# Altium PCB Q24_BRAKE_LIGHT.PcbDoc
Units mil, origin at the board's own origin, x right, y up, seen from the top; angles counter-clockwise.
Board outline 5151.65 x 2362.2 mil, 2 copper layers (Top Layer, Bottom Layer); 73 components, 8 nets, 146 pads, 31 vias.
Unrouted connection lines stored in the file: 6.
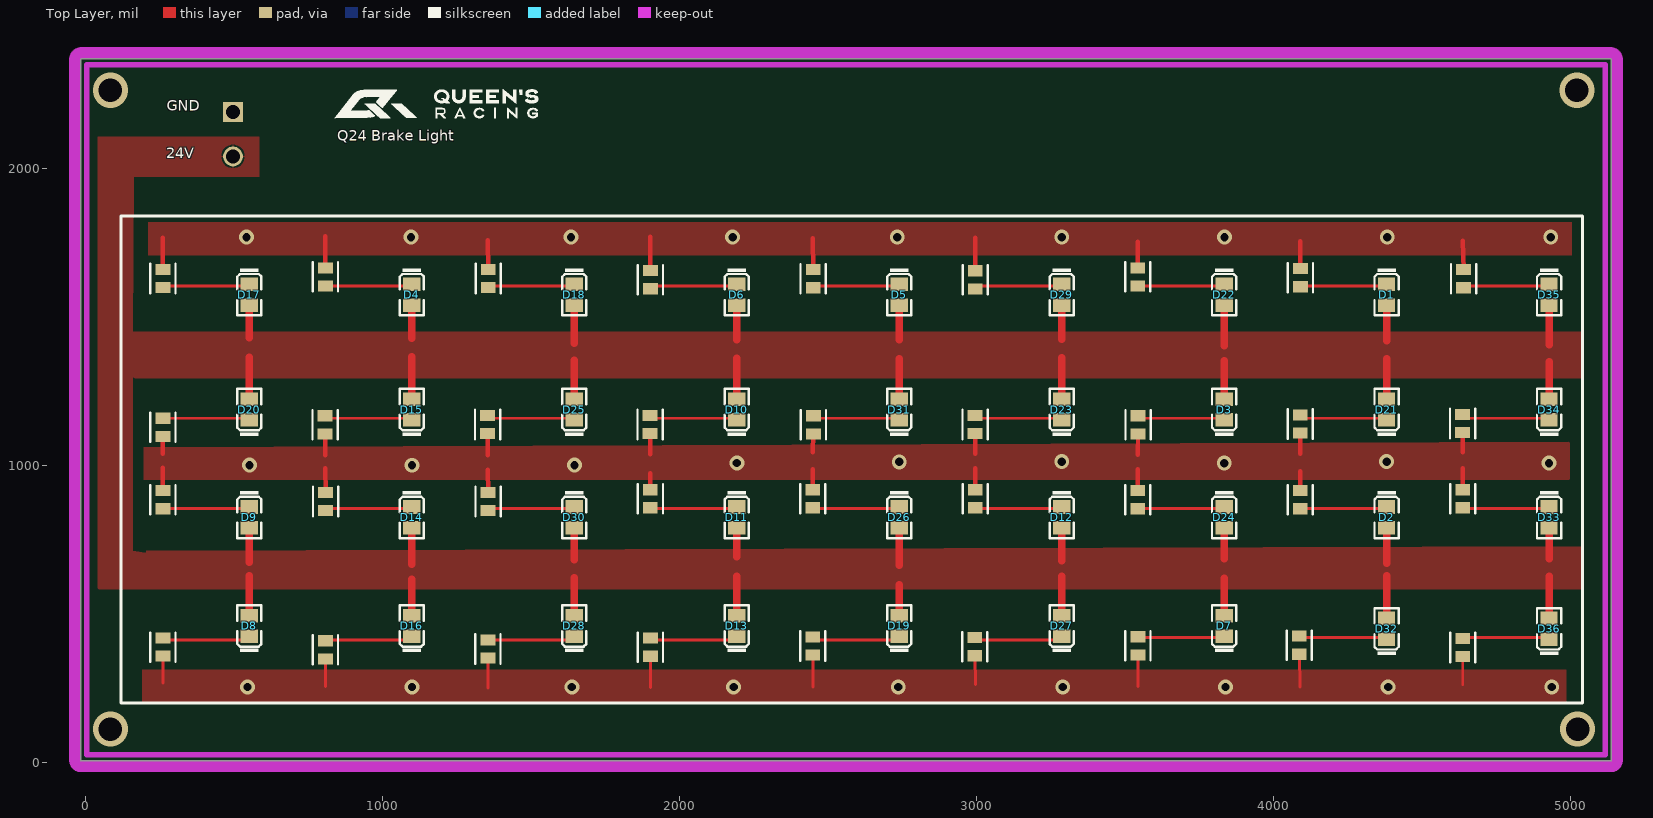
[diagram p0: Top Layer view]
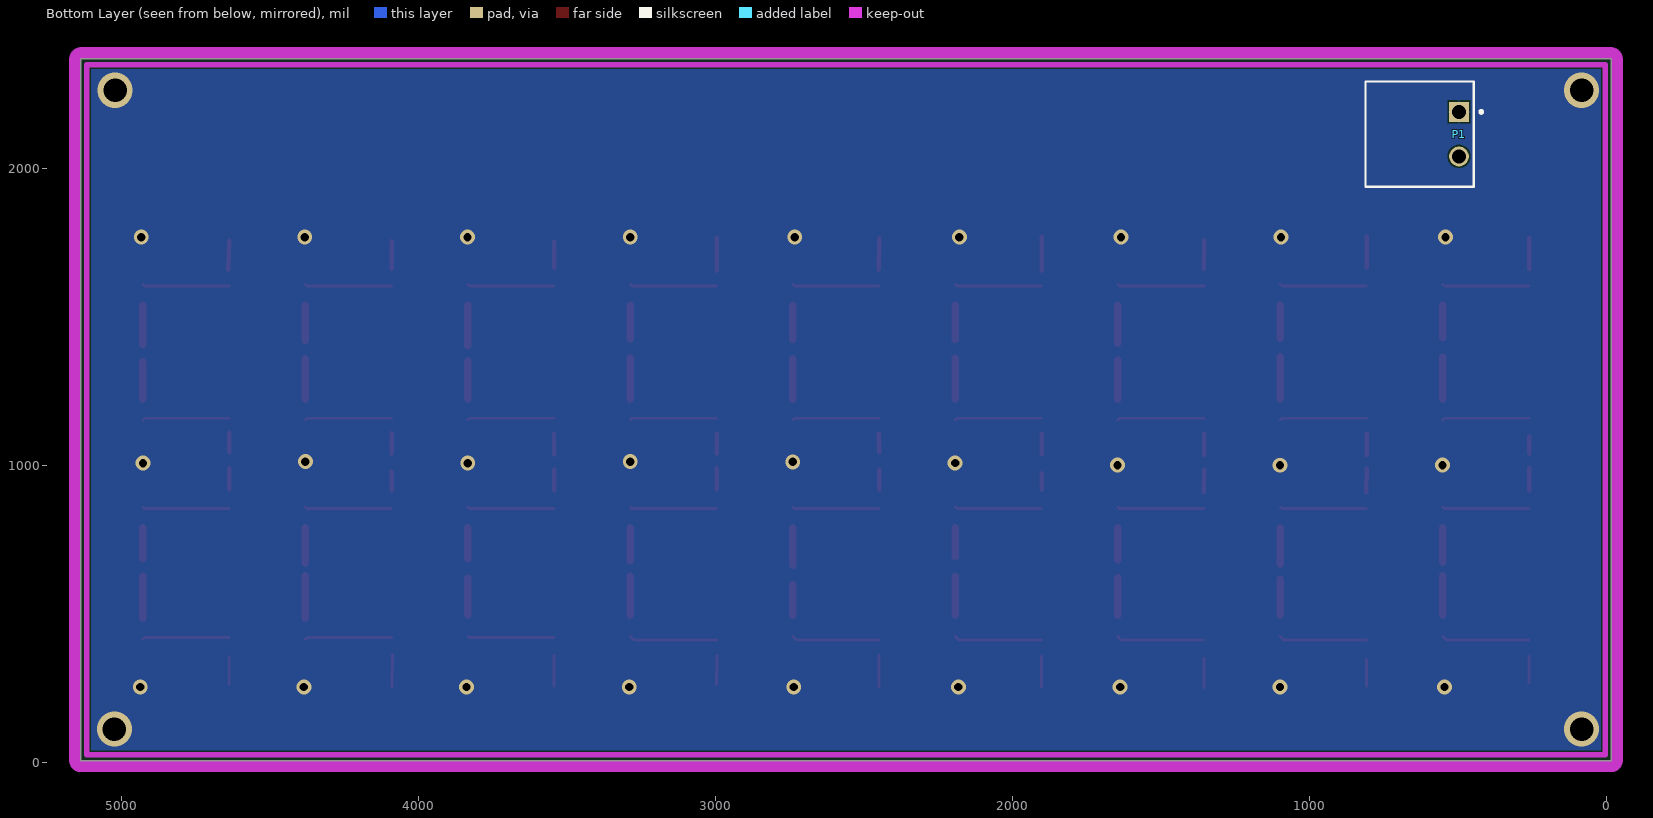
[diagram p1: Bottom Layer view, seen from below]

## Layer stack, top to bottom
Top Solder: solder mask 0.4, Solder Resist, Dk 3.5
Top Layer: signal copper 1.4
Dielectric 1: dielectric 12.6, FR-4, Dk 4.8
Bottom Layer: signal copper 1.4
Bottom Solder: solder mask 0.4, Solder Resist, Dk 3.5

## Board outline
-16.63,5.22 -16.63,2367.43 5135.03,2367.43 5135.03,5.22

## Design rules (kind name [scope] priority, off if disabled: settings)
BoardOutlineClearance [All] p1: gap=7.87 ignorepadtopadclearanceinfootprint=FALSE
Clearance [All] p1: gap=5 ignorepadtopadclearanceinfootprint=FALSE except(9.84: Arc-Hole Track-Hole SMDPad-Hole THPad-Hole Via-Hole Fill-Hole Poly-Hole Region-Hole Text-Hole)
ComponentClearance [All] p1: gap=5 collisioncheckmode=3 verticalgap=5 showdistances=TRUE
DiffPairsRouting [All] p1: maxlimit=10 minlimit=5 mostfreqgap=5 toplayer_minwidth=5 toplayer_maxwidth=1000 toplayer_prefwidth=5 bottomlayer_minwidth=5 bottomlayer_maxwidth=1000 bottomlayer_prefwidth=5 maxuncoupledlength=500
Height [All] p1: minheight=0 maxheight=71497.94 prefheight=500
HoleSize [All] p1: absolutevalues=TRUE maxlimit=248.03 minlimit=11.81 maxpercent=80.000 minpercent=20.000
HoleToHoleClearance [All] p1: gap=9.84 allowstackedmicrovias=FALSE
MinimumAnnularRing [All] p1: minimumring=3
MinimumSolderMaskSliver [All] p1: minsoldermaskwidth=0
PlaneClearance [All] p1: clearance=5
PlaneConnect PlaneConnectPowerPads [InPadClass('PowerPads')] p1: planeconnectstyle=Direct reliefexpansion=20 reliefentries=4 reliefconductorwidth=10 reliefairgap=10
PlaneConnect [All] p2: pad.planeconnectstyle=Relief pad.reliefexpansion=11.81 pad.reliefentries=4 pad.reliefconductorwidth=5 pad.reliefairgap=5 via.planeconnectstyle=Direct via.reliefexpansion=11.81 via.reliefentries=4 via.reliefconductorwidth=5 via.reliefairgap=5
PolygonConnect PolygonConnectPowerPads [All vs (InPadClass('PowerPads'))] p1: connectstyle=Direct reliefconductorwidth=10 reliefentries=4 polygonreliefangle="90 Angle" airgapwidth=10
PolygonConnect [All] p2: thpad.connectstyle=Relief thpad.reliefconductorwidth=5 thpad.reliefentries=4 thpad.polygonreliefangle="90 Angle" thpad.airgapwidth=5 smdpad.connectstyle=Relief smdpad.reliefconductorwidth=5 smdpad.reliefentries=4 smdpad.polygonreliefangle="90 Angle" smdpad.airgapwidth=5 via.connectstyle=Direct via.reliefconductorwidth=5 via.reliefentries=4 via.polygonreliefangle="90 Angle" via.airgapwidth=5
RoutingVias [All] p1: holewidth=11.81 width=23.62 viastyle="Through Hole" minholewidth=11.81 minwidth=23.62 maxholewidth=23.62 maxwidth=259.84
SilkToSilkClearance [All] p1: silktosilkclearance=0
SilkToSolderMaskClearance [IsPad] p1: minsilkscreentomaskgap=5 clearancetoexposedcopper=TRUE
SolderMaskExpansion [All] p1: expansion=2.95 istentingtop=FALSE
Width [All] p1: maxlimit=1000 minlimit=5 preferedwidth=5 minimp=50.000000 maximp=50.000000 favimp=50.000000
20 further rules are at their usual default settings.

## Classes and differential pairs
component class Q24_BRAKE_LIGHT2: D1 D2 D3 D4 D5 D6 D7 D8 D9 D10 D11 D12 D13 D14 D15 D16 D17 D18 D19 D20 D21 D22 D23 D24 D25 D26 D27 D28 D29 D30 D31 D32 D33 D34 D35 D36 P1

## Components (designator, comment, footprint, x,y, rotation, side; value= is the part's Value field where it differs from the comment)
D1 "0805 White" 0805_LED_S1 4379.41,1573.58 r270 top
D2 "0805 White" 0805_LED_S1 4379.41,823.83 r270 top
D3 "0805 White" 0805_LED_S1 3832.4,1187.03 r90 top
D4 "0805 White" 0805_LED_S1 1097.33,1573.58 r270 top
D5 "0805 White" 0805_LED_S1 2738.37,1573.58 r270 top
D6 "0805 White" 0805_LED_S1 2191.35,1573.58 r270 top
D7 "0805 White" 0805_LED_S1 3832.4,458.41 r90 top
D8 "0805 White" 0805_LED_S1 550.31,458.41 r90 top
D9 "0805 White" 0805_LED_S1 550.31,823.83 r270 top
D10 "0805 White" 0805_LED_S1 2191.35,1187.03 r90 top
D11 "0805 White" 0805_LED_S1 2191.35,823.83 r270 top
D12 "0805 White" 0805_LED_S1 3285.38,823.83 r270 top
D13 "0805 White" 0805_LED_S1 2191.35,458.41 r90 top
D14 "0805 White" 0805_LED_S1 1097.33,823.83 r270 top
D15 "0805 White" 0805_LED_S1 1097.32,1187.03 r90 top
D16 "0805 White" 0805_LED_S1 1097.32,458.41 r90 top
D17 "0805 White" 0805_LED_S1 550.31,1573.58 r270 top
D18 "0805 White" 0805_LED_S1 1644.34,1573.58 r270 top
D19 "0805 White" 0805_LED_S1 2738.37,458.41 r90 top
D20 "0805 White" 0805_LED_S1 550.31,1187.03 r90 top
D21 "0805 White" 0805_LED_S1 4379.41,1187.03 r90 top
D22 "0805 White" 0805_LED_S1 3832.4,1573.58 r270 top
D23 "0805 White" 0805_LED_S1 3285.38,1187.03 r90 top
D24 "0805 White" 0805_LED_S1 3832.4,823.83 r270 top
D25 "0805 White" 0805_LED_S1 1644.34,1187.03 r90 top
D26 "0805 White" 0805_LED_S1 2738.37,823.83 r270 top
D27 "0805 White" 0805_LED_S1 3285.38,458.41 r90 top
D28 "0805 White" 0805_LED_S1 1644.34,458.41 r90 top
D29 "0805 White" 0805_LED_S1 3285.38,1573.58 r270 top
D30 "0805 White" 0805_LED_S1 1644.34,823.83 r270 top
D31 "0805 White" 0805_LED_S1 2738.37,1187.03 r90 top
D32 "0805 White" 0805_LED_S1 4379.41,448.65 r90 top
D33 "0805 White" 0805_LED_S1 4926.43,823.83 r270 top
D34 "0805 White" 0805_LED_S1 4926.43,1187.03 r90 top
D35 "0805 White" 0805_LED_S1 4926.43,1573.58 r270 top
D36 "0805 White" 0805_LED_S1 4926.43,448.65 r90 top
P1 "1803277" PHOE-1803277_V 495.39,2114.2 r270 bottom
R1 "ERJ-P06F1001V" FP-ERJP06-IPC_C 259.5,1628.02 r90 top
R2 "ERJ-P06F1001V" FP-ERJP06-IPC_C 806.51,1633.45 r90 top
R3 "ERJ-P06F1001V" FP-ERJP06-IPC_C 1354.7,1627.93 r90 top
R4 "ERJ-P06F1001V" FP-ERJP06-IPC_C 1900.63,1624.21 r90 top
R5 "ERJ-P06F1001V" FP-ERJP06-IPC_C 2448.6,1627.69 r90 top
R6 "ERJ-P06F1001V" FP-ERJP06-IPC_C 2994.57,1623.79 r90 top
R7 "ERJ-P06F1001V" FP-ERJP06-IPC_C 3541.59,1633.45 r90 top
R8 "ERJ-P06F1001V" FP-ERJP06-IPC_C 4089.03,1631.16 r90 top
R9 "ERJ-P06F1001V" FP-ERJP06-IPC_C 4638.28,1627.54 r90 top
R10 "ERJ-P06F1001V" FP-ERJP06-IPC_C 259.5,1127.16 r90 top
R11 "ERJ-P06F1001V" FP-ERJP06-IPC_C 805.26,1135.65 r90 top
R12 "ERJ-P06F1001V" FP-ERJP06-IPC_C 1352.64,1136.48 r90 top
R13 "ERJ-P06F1001V" FP-ERJP06-IPC_C 1899.45,1136.6 r90 top
R14 "ERJ-P06F1001V" FP-ERJP06-IPC_C 2449.57,1135.65 r90 top
R15 "ERJ-P06F1001V" FP-ERJP06-IPC_C 2993.89,1136.48 r90 top
R16 "ERJ-P06F1001V" FP-ERJP06-IPC_C 3542.36,1135.65 r90 top
R17 "ERJ-P06F1001V" FP-ERJP06-IPC_C 4088.33,1138.15 r90 top
R18 "ERJ-P06F1001V" FP-ERJP06-IPC_C 4635.15,1139.8 r90 top
R19 "ERJ-P06F1001V" FP-ERJP06-IPC_C 259.5,883.7 r90 top
R20 "ERJ-P06F1001V" FP-ERJP06-IPC_C 807.21,877.61 r90 top
R21 "ERJ-P06F1001V" FP-ERJP06-IPC_C 1353.97,877.61 r90 top
R22 "ERJ-P06F1001V" FP-ERJP06-IPC_C 1900.54,886.63 r90 top
R23 "ERJ-P06F1001V" FP-ERJP06-IPC_C 2447.56,886.63 r90 top
R24 "ERJ-P06F1001V" FP-ERJP06-IPC_C 2994.57,886.63 r90 top
R25 "ERJ-P06F1001V" FP-ERJP06-IPC_C 3541.59,883.7 r90 top
R26 "ERJ-P06F1001V" FP-ERJP06-IPC_C 4088.6,883.7 r90 top
R27 "ERJ-P06F1001V" FP-ERJP06-IPC_C 4635.62,886.63 r90 top
R28 "ERJ-P06F1001V" FP-ERJP06-IPC_C 259.5,387.25 r90 top
R29 "ERJ-P06F1001V" FP-ERJP06-IPC_C 806.51,378.02 r90 top
R30 "ERJ-P06F1001V" FP-ERJP06-IPC_C 1353.53,380.95 r90 top
R31 "ERJ-P06F1001V" FP-ERJP06-IPC_C 1900.88,387.14 r90 top
R32 "ERJ-P06F1001V" FP-ERJP06-IPC_C 2447.56,390.79 r90 top
R33 "ERJ-P06F1001V" FP-ERJP06-IPC_C 2992.81,388.56 r90 top
R34 "ERJ-P06F1001V" FP-ERJP06-IPC_C 3541.96,391.39 r90 top
R35 "ERJ-P06F1001V" FP-ERJP06-IPC_C 4085.45,393.51 r90 top
R36 "ERJ-P06F1001V" FP-ERJP06-IPC_C 4635.62,385.86 r90 top

## Footprints (in the part's own frame and the unit in brackets; to place one, negate y for a bottom-side part, rotate by r counter-clockwise, add the part's x,y. Pads: shape width x height; smd on the part's side, far side on the other; paste and mask are expansions set on the pad)
0805_LED_S1 [mm]
  rect 1.16x1.47 smd: A(0.89,0) K(-0.89,0)
  silkscreen extent -2.25,-1.04 1.77,1.03, body extent -1.01,-0.62 1.01,0.62, height 1.1
FP-ERJP06-IPC_C [mil]
  rect 37.59x49.69 smd paste+0 mask+0: 1(-30.54,0) 2(30.54,0)
  silkscreen extent -49,-42 49,42, body extent -53,-31 53,31, height 10
PHOE-1803277_V [mm] "CONN, Body 9.2x9.01mm, Pitch 3.81mm"
  rect 1.7x1.7 hole 1.2: 1(-1.905,0)
  round 1.7 hole 1.2: 2(1.905,0)
  silkscreen extent -4.5,-8 4.5,2.02, body extent -4.51,-8 4.5,1.29, height 7.25

## Part data
D1 D2 D3 D4 D5 D6 D7 D8 D9 D10 D11 D12 D13 D14 D15 D16 D17 D18 D19 D20 D21 D22 D23 D24 D25 D26 D27 D28 D29 D30 D31 D32 D33 D34 D35 D36: library part "0805 LED White", "LED", Color=White, Package=0805, SuppliersPartNumber=C34499, ComponentLink1Description=供应商链接, ComponentLink1URL=http://www.szlcsc.com/product/details_35468.html, Supplier=LC
P1: library part CMP-002-00014-2, "Male Header, Pitch 3.81 mm, 1 x 2 Position, Height 7.25 mm, Tail Length 3.4 mm, RoHS, Bulk", Colour=Green, Current Rating=8A, Manufacturer="Phoenix Contact", Package Description="Male Header, Pitch 3.81 mm, 1 x 2 Position, Height 7.25 mm, Tail Length 3.4 mm", Package Quantity=50, Voltage Rating=160V, Case/Package=1803277, Connector Type=Header, Contact Plating=Tin, Datasheet URL=https://datasheet.ciiva.com/16096/1803277-16096845.pdf, Datasheet Version=Feb-14, Diameter=7.25mm, Gender=Male, Lead Pitch=0.15inch, Manufacturer URL=http://www.phoenixcontact.com/, Max Current Rating=8A, Mounting Technology=TH, Package Reference=1803277, Packaging=Bulk, Pins=2, RoHS Compliant=True, Rows=1
R1 R2 R3 R4 R5 R6 R7 R8 R9 R10 R11 R12 R13 R14 R15 R16 R17 R18 R19 R20 R21 R22 R23 R24 R25 R26 R27 R28 R29 R30 R31 R32 R33 R34 R35 R36: library part CMP-05422-000125-1, "RES SMD 1K OHM 1% 1/2W 0805", Case Code (Imperial)=0805, Case Code (Metric)=2012, Max Operating Temperature=155°C, Max Power Dissipation=500mW, Min Operating Temperature=-55°C, Package Quantity=5000, Resistance=1kR, Resistance Tolerance=1%, Resistor Type="Thick Film", Temperature Coefficient=100ppm/°C, Voltage Rating=150V, Case/Package=0805, Construction=Rectangular, Contact Plating=Tin, Depth=1.25mm, Features="Automotive AEC-Q200", Height=0.6mm, Length=2mm, Military Standard=Not, Mount="Surface Mount", Number of Pins=2, Number of Terminations=2, Packaging="Tape and Reel", Power Rating=500mW, Radiation Hardening=No, REACH SVHC="No SVHC", RoHS Compliant=Yes, Series=ERJ, Technology="THICK FILM", Termination=Tab, Tolerance=1%, Voltage Rating (DC)=150V, Width=1.2mm

## Via types
v1: diameter 50, hole 28, Top Layer to Bottom Layer, 27 vias
v2: diameter 118.11, hole 78.74, Top Layer to Bottom Layer, 4 vias

## Nets (pads, with @x,y where several pads share a name; then routed paths per layer and width w, separated by ;. In a path a pad name is that pad's centre, name@x,y a point inside that pad or via, vN(x,y) a via of type N, cw(c..) or ccw(c..) an arc to the next point about the centre after c; other vN are vias at no path point)
+24: D1.A D2.A D3.A D4.A D5.A D6.A D7.A D8.A D9.A D10.A D11.A D12.A D13.A D14.A D15.A D16.A D17.A D18.A D19.A D20.A D21.A D22.A D23.A D24.A D25.A D26.A D27.A D28.A D29.A D30.A D31.A D32.A D33.A D34.A D35.A D36.A P1.2 | length 4480.6
  Top Layer w25: D8.A 550.31,627.4 ; 550.31,673.5 D9.A ; D20.A 550.31,1363.85 ; 550.31,1427.78 D17.A ; D16.A 1097.32,616 ; 1097.33,665.6 D14.A ; D15.A 1097.32,1365.63 ; 1097.33,1427.31 D4.A ; D28.A 1644.34,620.99 ; 1644.34,681.21 D30.A ; D25.A 1644.34,1353.16 ; 1644.34,1409.71 D18.A ; D13.A 2191.35,626.27 ; 2191.36,691.54 D11.A ; D10.A 2191.35,1360.4 ; 2191.36,1421.25 D6.A ; D19.A 2738.37,597.61 ; 2738.37,662.81 D26.A ; D31.A 2738.37,1358.52 ; 2738.37,1422 D5.A ; D27.A 3285.38,626.39 ; 3285.38,677.3 D12.A ; D23.A 3285.38,1361.33 ; 3285.38,1423.74 D29.A ; D7.A 3832.4,618.31 ; 3832.4,685.2 D24.A ; D3.A 3832.4,1351.09 ; 3832.4,1402.41 D22.A ; D32.A 4379.41,627.82 ; 4379.42,669.59 D2.A ; D21.A 4379.41,1358.71 ; 4379.42,1419.13 D1.A ; D36.A 4926.43,625.27 ; 4926.43,685.34 D33.A ; D34.A 4926.43,1347.24 ; 4926.43,1405.8 D35.A
GND: P1.1 | length 3074
  Top Layer w10: 259.5,265.55 259.5,356.71 ; 806.51,254.09 806.51,347.49 ; 1353.53,250.24 1353.53,350.41 ; 1900.54,250.8 1900.88,356.6 ; 2447.56,252.29 2447.56,360.25 ; 2992.81,358.02 2994.57,261.6 ; 3541.59,254.88 3541.96,360.85 ; 4085.45,362.97 4087.8,252.24 ; 4635.62,261.06 4635.62,355.32
  Top Layer w15: 259.5,914.24 259.5,990.25 ; 259.5,1037.52 259.5,1096.62 ; 259.5,1658.55 259.5,1765.71 ; 805.26,1105.11 806.51,1032.9 ; 806.51,989.93 807.21,908.15 ; 806.51,1663.99 806.51,1770.88 ; 1352.64,1105.94 1353.53,1033.46 ; 1352.72,1756.38 1354.7,1658.47 ; 1353.53,984.78 1355.24,908.15 ; 1899.45,1106.06 1900.54,1036.84 ; 1900.25,971.95 1900.54,971.66 1900.54,917.16 ; 1900.54,1769.44 1900.63,1654.75 ; 2447.56,917.16 2447.56,985.24 ; 2447.56,1042.92 2449.57,1105.12 ; 2447.56,1763.14 2448.6,1658.22 ; 2993.89,1105.94 2994.57,1038.35 ; 2994.57,917.16 2994.57,989.46 ; 2994.57,1654.33 2994.57,1764.68 ; 3541.59,914.24 3541.59,985.23 ; 3541.59,1034.5 3542.36,1105.12 ; 3541.59,1663.99 3541.59,1752.34 ; 4087.8,1754.08 4089.03,1661.7 ; 4088.19,979.66 4088.6,979.25 4088.6,914.24 ; 4088.33,1107.61 4088.6,1037.46 ; 4635.15,1109.26 4635.62,1042.53 ; 4635.62,917.16 4635.62,989.01 ; 4635.62,1754.86 4638.28,1658.08
  other v1: 544.14,253.03 1098.23,253.03 1636.39,253.03 2180.93,253.03 2735.02,253.03 3289.1,253.03 3836.83,253.03 4384.55,253.03 4935.46,253.03 551.21,999.67 1098.08,999.66 1644.94,999.67 2191.81,1006.94 3832.42,1006.45 4926.15,1006.45 2738.68,1010.68 3285.55,1011.53 4379.29,1011.53 540.82,1767.38 1094.91,1767.38 1633.07,1767.38 2177.61,1767.38 2731.7,1767.38 3285.78,1767.38 3833.51,1767.38 4381.23,1767.38 4932.14,1767.38
  other v2: 82.3,111.07 5022.37,111.07 82.3,2262.05 5019.71,2262.05
NetR5_1: R5.1 R6.1
NetR5_2: R5.2 R6.2
NetR19_1: R19.1 R20.1
NetR19_2: R19.2 R20.2
NetR33_1: R33.1 R34.1
NetR33_2: R33.2 R34.2
pads on no net: D1.K D2.K D3.K D4.K D5.K D6.K D7.K D8.K D9.K D10.K D11.K D12.K D13.K D14.K D15.K D16.K D17.K D18.K D19.K D20.K D21.K D22.K D23.K D24.K D25.K D26.K D27.K D28.K D29.K D30.K D31.K D32.K D33.K D34.K D35.K D36.K R1.1 R1.2 R2.1 R2.2 R3.1 R3.2 R4.1 R4.2 R7.1 R7.2 R8.1 R8.2 R9.1 R9.2 R10.1 R10.2 R11.1 R11.2 R12.1 R12.2 R13.1 R13.2 R14.1 R14.2 R15.1 R15.2 R16.1 R16.2 R17.1 R17.2 R18.1 R18.2 R21.1 R21.2 R22.1 R22.2 R23.1 R23.2 R24.1 R24.2 R25.1 R25.2 R26.1 R26.2 R27.1 R27.2 R28.1 R28.2 R29.1 R29.2 R30.1 R30.2 R31.1 R31.2 R32.1 R32.2 R35.1 R35.2 R36.1 R36.2
copper on no net: | length 10571.9
  Top Layer w10: 259.5,411.49 538.43,411.49 550.31,423.37 ; 259.5,853.16 544.6,853.16 550.31,858.87 ; 259.5,1157.7 544.6,1157.7 550.31,1151.99 ; 259.5,1602.91 544.6,1602.91 550.31,1608.62 ; 806.51,411.49 1085.44,411.49 1097.32,423.37 ; 806.51,853.16 1091.62,853.16 1097.33,858.87 ; 806.51,1157.7 1091.62,1157.7 1097.32,1151.99 ; 806.51,1602.91 1091.62,1602.91 1097.33,1608.62 ; 1352.72,1602.91 1638.63,1602.91 1644.34,1608.62 ; 1353.53,411.49 1632.46,411.49 1644.34,423.37 ; 1353.53,853.16 1638.63,853.16 1644.34,858.87 ; 1353.53,1157.7 1638.63,1157.7 1644.34,1151.99 ; 1900.54,411.49 2179.47,411.49 2191.35,423.37 ; 1900.54,853.16 2185.65,853.16 2191.36,858.87 ; 1900.54,1157.7 2185.65,1157.7 2191.35,1151.99 ; 1900.54,1602.91 2185.65,1602.91 2191.36,1608.62 ; 2447.56,410.55 2725.55,410.55 2738.37,423.37 ; 2447.56,853.16 2732.66,853.16 2738.37,858.87 ; 2447.56,1157.7 2732.66,1157.7 2738.37,1151.99 ; 2447.56,1602.91 2732.66,1602.91 2738.37,1608.62 ; 2994.57,411.49 3273.5,411.49 3285.38,423.37 ; 2994.57,853.16 3279.68,853.16 3285.38,858.87 ; 2994.57,1157.7 3279.68,1157.7 3285.38,1151.99 ; 2994.57,1602.91 3279.68,1602.91 3285.38,1608.62 ; 3541.59,419.32 3828.35,419.32 3832.4,423.37 ; 3541.59,853.16 3826.69,853.16 3832.4,858.87 ; 3541.59,1157.7 3826.69,1157.7 3832.4,1151.99 ; 3541.59,1602.91 3826.69,1602.91 3832.4,1608.62 ; 4087.8,419.32 4373.71,419.32 4379.41,413.61 ; 4087.8,1602.91 4373.71,1602.91 4379.42,1608.62 ; 4088.6,853.16 4373.71,853.16 4379.42,858.87 ; 4088.6,1157.7 4373.71,1157.7 4379.41,1151.99 ; 4635.62,419.32 4920.72,419.32 4926.43,413.61 ; 4635.62,853.16 4920.72,853.16 4926.43,858.87 ; 4635.62,1157.7 4920.72,1157.7 4926.43,1151.99 ; 4635.62,1602.91 4920.72,1602.91 4926.43,1608.62

## Polygon pours and split planes (outlines as drawn)
GND on Top Layer "GND_L01_P017" (solid, remove dead copper, pour order 17): 209.59,1817.9 209.59,1736.28 209.59,1706.02 5003.1,1706.02 5003.1,1817.9
GND on Top Layer "GND_L01_P016" (solid, remove dead copper, pour order 16): 190.66,311.38 190.66,229.77 190.66,199.51 4984.17,199.51 4984.17,311.38
GND on Top Layer "GND_L01_P011" (solid, remove dead copper, pour order 11): 195.99,1060.38 195.19,1059.57 195.19,950.65 4992.57,950.65 4996.63,946.59 4996.63,1078.27
+24 on Top Layer "+24_L01_P012" (solid, pour order 12): 158.15,1449.01 5039.01,1449.01 5039.02,1449.03 5039.02,1292.26 165.32,1292.26 157.31,1295.49 158.15,710.91 202.46,705.29 203.41,698.38 203.41,710.91 5039.02,727.56 5039.02,632.32 5039.02,581.77 4979.09,581.77 42.56,581.77 40.01,584.32 40.01,2105.79 584.54,2105.79 584.54,1971.43 159.87,1971.43 160.98,1970.32
GND on Bottom Layer "GND_L02_P010" (solid, remove dead copper, pour order 10): -16.63,2367.43 -16.63,5.22 5132.41,5.22 5135.03,2.61 5132.41,2364.82

## Keep-outs
Keep-Out Layer:
  lines w19.68: 3.06,24.91 3.06,2347.74 5115.34,2347.74 5115.34,24.91 3.06,24.91
  lines w39.37: -36.31,5.22 ccw(c-16.63,5.22) -16.63,-14.46 ; -36.31,5.22 ccw(c-16.63,5.22) -16.63,-14.46 ; -36.31,5.22 -36.31,2367.43 ; -36.31,2367.43 cw(c-16.63,2367.43) -16.63,2387.11 ; -36.31,2367.43 cw(c-16.63,2367.43) -16.63,2387.11 ; -16.63,-14.46 5135.03,-14.46 ; -16.63,2387.11 5135.03,2387.11 ; 5135.03,-14.46 ccw(c5135.03,5.22) 5154.71,5.22 ; 5135.03,-14.46 ccw(c5135.03,5.22) 5154.71,5.22 ; 5135.03,2387.11 cw(c5135.03,2367.43) 5154.71,2367.43 ; 5135.03,2387.11 cw(c5135.03,2367.43) 5154.71,2367.43 ; 5154.71,5.22 5154.71,2367.43

## Silkscreen, mask and mechanical layers (free items; w line width, h text height)
Top Overlay:
  drawing of 20 lines, arcs and shapes, not listed
  text "GND" at 271.56,2181.2 h60
  text "Q24 Brake Light" at 845.78,2080.6 h60
  text "24V" at 271.5,2021.61 h60
Bottom Overlay:
Mechanical 1:
  the board outline again, w10